# Altium PCB pay-ssm.PcbDoc (part 2 of 2)
Units mm, origin at the board's own origin, x right, y up, seen from the top; angles counter-clockwise.
Board outline 128 x 54 mm, 4 copper layers (Top Layer, GND, VCC, Bottom Layer), stack 0.778 mm thick; 182 components, 174 nets, 793 pads, 185 vias.
Unrouted connection lines stored in the file: 368.
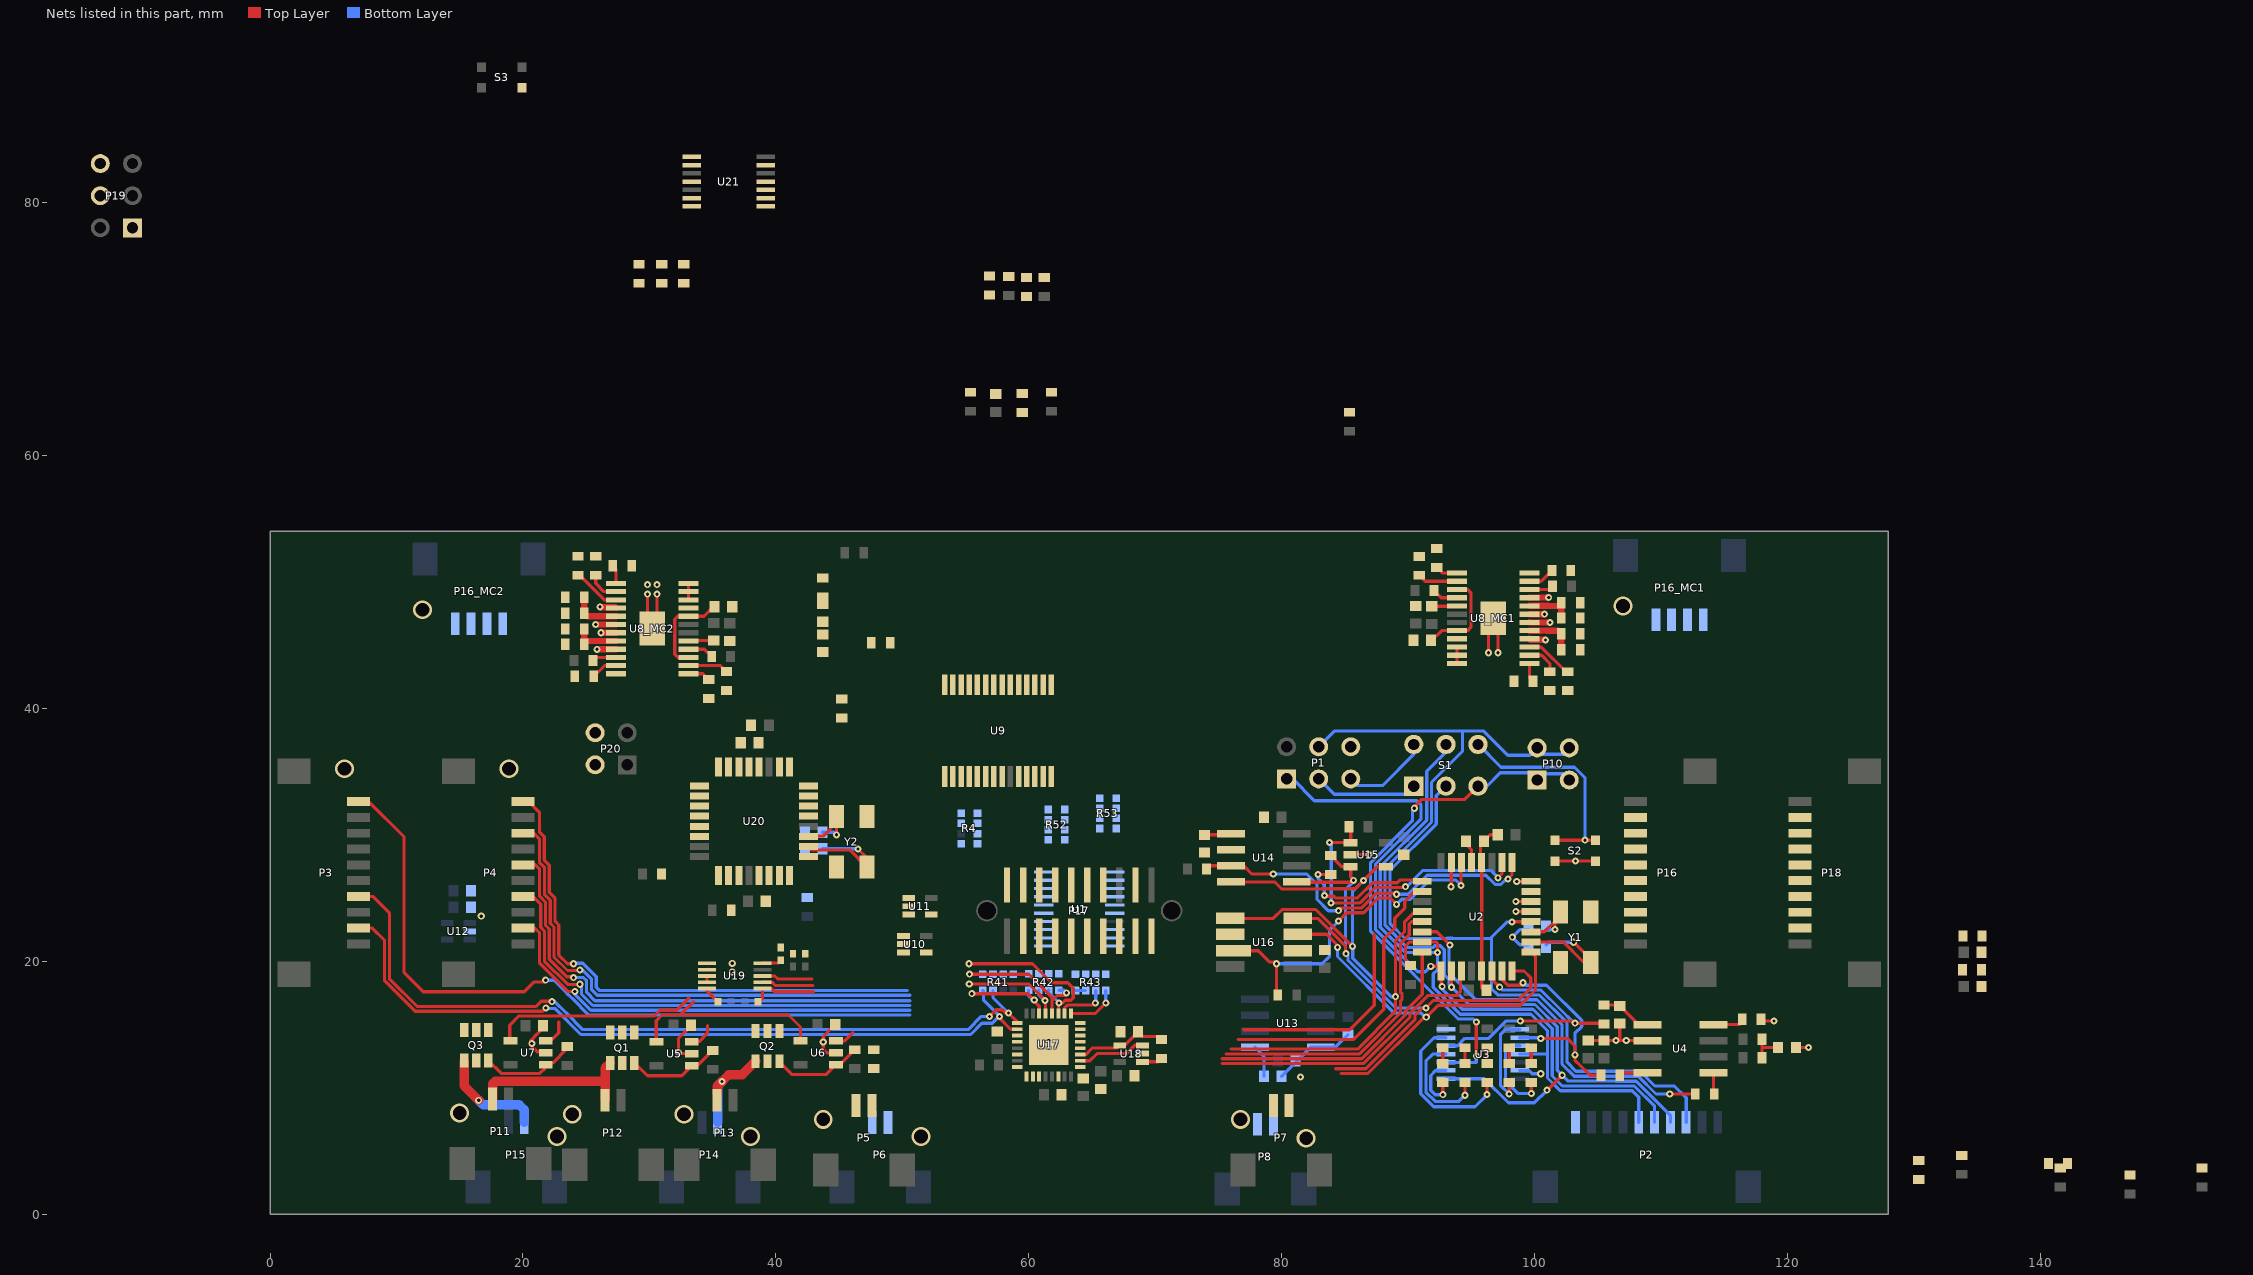
[diagram p4: the nets of this part, all layers, seen from the top]

## Via types
v1: diameter 0.559, hole 0.254, Top Layer to Bottom Layer, 145 vias
v2: diameter 1.5, hole 1.1, Top Layer to Bottom Layer, 32 vias
v3: diameter 6, hole 3.6, Top Layer to Bottom Layer, 8 vias

## Nets (pads, with @x,y where several pads share a name; then routed paths per layer and width w, separated by ;. In a path a pad name is that pad's centre, name@x,y a point inside that pad or via, vN(x,y) a via of type N, cw(c..) or ccw(c..) an arc to the next point about the centre after c; other vN are vias at no path point) (continued)
CH4: P3.10 R42.8 U17.14 | length 65.2
  Top Layer w0.254: P3.10@7,32.625 7.8,32.625 10.6,29.825 10.6,19.1 12.115,17.585 20.1,17.585 20.865,18.35 21.65,18.35 v1(21.8,18.5) ; v1(55.5,17.437) 59.937,17.437 v1(60.437,16.937) 60.323,16.937 60.827,16.433 U17.14@60.827,15.865
  Bottom Layer w0.254: v1(21.8,18.5) 22.454,18.5 23.467,17.488 23.467,17.479 23.879,17.067 23.888,17.067 25.216,15.738 50.6,15.738 ; R42.8@59.989,17.7 59.989,17.271 60.323,16.937 v1(60.437,16.937)
CH6: P4.6 R42.5 U17.12 | length 50.1
  Top Layer w0.254: P4.6@20,27.625 20.975,27.625 21.313,27.287 21.313,25.126 21.781,24.658 21.781,22.847 22.075,22.553 22.075,20.174 23.472,18.776 23.923,18.776 v1(24,18.7) ; v1(55.31,18.975) 60.025,18.975 61.833,17.167 61.833,16.888 ; U17.12@61.843,15.865 61.843,16.275 61.833,16.285 61.833,16.888 ; v1(62.989,17.5) 62.989,17.356 62.927,17.293 62.239,17.293 61.833,16.888
  Bottom Layer w0.254: v1(24,18.7) 24.017,18.717 24.783,18.717 25.033,18.467 25.033,17.537 25.69,16.881 50.6,16.881 ; R42.5@62.389,17.7 62.789,17.7 v1(62.989,17.5)
CH7: P4.4 R42.6 U17.11 | length 50.4
  Top Layer w0.254: P4.4@20,25.125 20.775,25.125 21.4,24.5 21.4,22.689 21.694,22.395 21.694,20.016 23.543,18.167 24.483,18.167 v1(24.5,18.183) ; v1(55.288,19.8) 60.3,19.8 61.8,18.3 63.104,18.3 63.531,17.873 63.531,17.1 63.343,16.912 62.899,16.912 62.687,16.7 v1(62.4,16.7) 62.351,16.651 U17.11@62.351,15.865
  Bottom Layer w0.254: v1(24.5,18.183) 24.633,18.05 24.633,17.399 25.532,16.5 50.6,16.5 ; R42.6@61.589,17.7 61.495,17.605 v1(62.4,16.7)
  other v2: 18.9,35.225
CH8: P4.8 R43.6 U17.10 | length 45.3
  Top Layer w0.254: P4.8@20,30.125 20.875,30.125 21.3,29.7 21.3,27.839 21.694,27.445 21.694,25.284 22.162,24.816 22.162,23.004 22.456,22.71 22.456,20.331 23.521,19.267 24.467,19.267 v1(24.5,19.3) ; U17.10@62.834,15.865 62.834,16.308 63.057,16.531 65.1,16.531 v1(65.269,16.7)
  Bottom Layer w0.254: v1(24.5,19.3) 24.739,19.3 25.414,18.624 25.414,17.77 25.87,17.315 50.6,17.315 ; v1(65.269,16.7) 65.3,16.731 R43.6@65.3,17.685
CH9: P4.10 R43.5 U17.9 | length 46.9
  Top Layer w0.254: P4.10@20,32.625 20.475,32.625 21.3,31.8 21.3,30.239 21.681,29.858 21.681,27.997 22.075,27.603 22.075,25.441 22.543,24.973 22.543,23.162 22.837,22.868 22.837,20.489 23.526,19.8 v1(24,19.8) ; U17.9@63.342,15.865 65.265,15.865 v1(66.1,16.7)
  Bottom Layer w0.254: v1(24,19.8) 24.033,19.833 24.744,19.833 25.795,18.782 25.795,17.928 26.027,17.696 50.4,17.696 ; v1(66.1,16.7) R43.5@66.1,17.685
CH10: U11.1 U11.4 U17.8
CH11: U10.1 U10.4 U17.7
CLKIN: P17.17 U1.5
DAC_C\L\R\: R47.1 U2.32 U19.5 | length 22.8
  Top Layer w0.254: U19.5@34.551,17.835 34.551,17.665 R47.1@35.414,16.803 ; 75.3,12.291 86.326,12.291 89.781,15.746 89.781,16.03 91.125,17.374 U2.32@91.125,20.728
DAC_C\S\: R46.1 U2.29 U19.6 | length 29.1
  Top Layer w0.254: R46.1@38.601,16.803 38.703,16.803 38.951,17.051 U19.6@38.951,17.835 39.663,17.835 39.913,17.585 42.99,17.585 ; 75.6,12.672 86.168,12.672 89.4,15.904 89.4,16.846 89.533,16.979 89.533,17.421 89.4,17.554 89.4,21.4 90.1,22.1 90.1,22.948 90.28,23.128 U2.29@91.125,23.128
DATA_RDY: R51.2 U2.16 U20.29 | length 1.3
  Top Layer w0.254: v1(98.6,26.3) 99.698,26.3 U2.16@99.725,26.328
  Bottom Layer w0.254: v1@98.433,26.3 v1(98.6,26.3)
DECAY: R30_MC1.2 R30_MC2.2 U8_MC1.3 U8_MC2.3 U9.23 | length 7.6
  Top Layer w0.254: R30_MC2.2@24.35,50.532 24.478,50.532 26.428,48.582 U8_MC2.3@27.36,48.582 ; U8_MC1.3@99.615,44.85 100.547,44.85 102.497,42.9 R30_MC1.2@102.625,42.9
DIR_A: U8_MC1.12 U9.24
DIR_B: U8_MC2.12 U9.4
E\N\_A: R23_MC1.1 U8_MC1.10 U9.26 | length 1.9
  Top Layer w0.254: U8_MC1.10@99.615,49.4 101.175,49.4 R23_MC1.1@101.425,49.65
E\N\_B: R23_MC2.1 U8_MC2.10 U9.6 | length 1.9
  Top Layer w0.254: R23_MC2.1@25.55,43.782 25.8,44.032 U8_MC2.10@27.36,44.032
F\L\T\_A: R20_MC1.1 U8_MC1.16 U9.21 | length 2.1
  Top Layer w0.254: R20_MC1.1@92.049,49.325 92.624,48.75 U8_MC1.16@93.875,48.75
F\L\T\_B: R20_MC2.1 U8_MC2.16 U9.22 | length 2.1
  Top Layer w0.254: U8_MC2.16@33.1,44.682 34.351,44.682 R20_MC2.1@34.926,44.107
GND: C1.1 C2.1 C4.1 C5.1 C6.2 C7.1 C8.1 C9.1 C10.1 C11.1 C12.1 C13.2 C14.2 C15.2 C16_MC1.1 C16_MC2.1 C18_MC1.1 C18_MC2.1 C19.1 C20.1 C21.1 C22.1 C23.1 C24.1 C25.1 C26.1 C27.1 C28.1 C29.1 C30.1 C31.1 C32.1 C33.1 C34.1 C35.1 C36.1 C37.1 C38.1 C39.2 C44.1 C45.1 C62.1 C63.1 C64.2 P1.6 P2.1 P6.2 P8.2 P16.2 P16.9 P17.1 P17.20 P18.2 P18.9 P19.6 Q1.4 Q2.4 Q3.4 R3.1 R16.1 R21_MC1.1 R21_MC2.1 R22_MC1.1 R22_MC2.1 R24_MC1.1 R24_MC2.1 R25_MC1.1 R25_MC2.1 R26_MC1.1 R26_MC2.1 R27_MC1.1 R27_MC2.1 R28_MC1.1 R28_MC2.1 R29_MC1.1 R29_MC2.1 R30_MC1.1 R30_MC2.1 R31_MC1.1 R31_MC2.1 R35.1 R37.1 R39.1 R40.1 R41.1 R41.2 R41.3 R41.4 R42.1 R42.2 R42.3 R42.4 R43.1 R43.2 R43.3 R43.4 R44.2 R51.1 S2.2 S3.3 U1.10 U2.5 U2.20 U3.7 U3.13 U4.2 U5.2 U6.2 U7.2 U8_MC1.21 U8_MC1.25 U8_MC2.21 U8_MC2.25 U9.3 U9.7 U9.8 U9.10 U10.2 U11.2 U12.2 U13.4 U14.2 U15.2 U16.2 U16.6 U17.1 U17.4 U17.5 U17.6 U17.19 U17.20 U17.22 U17.27 U17.30 U17.33 U18.2 U19.3 U19.4 U20.5 U20.20 U21.7 U21.13 Y1.2 Y1.4 Y2.2 Y2.4 | length 59.7
  Top Layer w0.254: C14.2@21.7,15.174 21.7,14.8 21.154,14.254 21.145,14.254 20.609,13.718 20.609,13.5 v1(20.7,13.5) 20.7,13.471 20.6,13.371 21.135,12.836 U7.2@21.75,12.836 ; v1(29.85,49.032) 29.85,46.782 30.6,47.532 v1(30.6,49.032) ; C13.2@33.3,14.948 33.3,14.898 32.3,13.898 v1(32.3,12.798) 32.4,12.698 U5.2@33.35,12.698 ; U19.4@34.551,18.335 U19.3@34.551,18.835 ; C15.2@44.7,15 43.75,14.05 v1(43.75,13.604) 43.75,13.05 44.05,12.75 U6.2@44.75,12.75 ; v1(61.589,13.159) U17.33@61.589,13.376 v1(61.589,13.738) ; U16.6@81.275,20.837 U16.6@81.325,20.887 ; U15.2@85.467,28.432 86.9,28.432 v1(86.907,28.425) ; C6.2@95.9,29.675 95.725,29.5 95.725,27.928 U2.20@95.825,27.828 U2.5@95.825,19.228 95.825,17.875 C4.1@96.2,17.5 ; C6.2@96,29.5 96.5,30 C5.1@97.1,30 ; v1(96.375,44.4) 96.375,45.9 97.125,46.65 v1(97.125,44.4) ; S2.2@101.625,27.925 v1(103.25,27.925) S2.2@104.825,27.925 ; C9.1@104.25,13.731 C10.1@105.5,13.731 v1(106.45,13.731) 106.46,13.721 106.75,13.721 ; C12.1@106.75,15.074 106.75,13.721 ; U4.2@108.89,13.781 U4.2@108.95,13.721 v1(107.26,13.721) 106.75,13.721 ; R16.1@118,15.281 v1(118.95,15.281) ; C11.1@120.672,13.177 v1(121.678,13.177)
  Bottom Layer w0.254: v1(16.7,23.562) v1@16.8,23.562 ; C25.1@80,10.9 82.295,13.195 U13.4@83.1,13.195 84.247,13.195 C24.1@85.252,14.2 ; U3.13@98.842,11.365 99.568,11.365 99.833,11.1 v1(100.5,11.1) ; C8.1@99.525,21.303 98.85,21.303 v1(98.25,21.903) 98.85,22.503 C7.1@99.525,22.503
  other v1: 81.5,10.85 36.551,19.162 36.551,19.835 29.85,49.782 30.6,49.782
  other v2: 81.95,6 51.48,6.15
HM_C\S\: R45.1 U2.17 U14.3 | length 29.3
  Top Layer w0.254: R45.1@74.05,27.3 74.296,27.546 U14.3@76,27.546 77.004,27.546 77.65,26.9 v1(79.341,26.9) ; v1(84.5,24) 84.719,24.219 86.328,24.219 87.49,25.381 89.019,25.381 v1(89.1,25.3) ; v1(97.9,26.5) 98.225,26.825 U2.17@98.225,27.828
  Bottom Layer w0.254: v1(79.341,26.9) 82,26.9 82.8,26.1 82.8,24.9 83.7,24 v1(84.5,24) ; v1(89.1,25.3) 90,25.3 91.507,26.807 96.163,26.807 96.904,26.067 97.346,26.067 97.779,26.5 v1(97.9,26.5)
INTA: U2.26 U9.20 | length 23.5
  Top Layer w0.254: 76.563,13.815 85.695,13.815 88.086,16.206 88.086,21.8 88.122,21.8 88.951,22.629 88.951,23.416 89.74,24.204 89.74,24.727 90.541,25.528 U2.26@91.125,25.528
INTB: U9.19
LBK: R14.2 U2.30 | length 30.3
  Top Layer w0.254: U2.30@91.125,22.328 92.272,22.328 v1(93.308,21.292) v1@93.308,21.328 ; v1(110.7,9.5) R14.2@112.723,9.5
  Bottom Layer w0.254: v1@93.248,21.079 93.248,20.321 93.248,19.091 93.614,18.725 93.614,18.686 95.342,16.958 100.203,16.958 102.176,14.985 102.176,11.864 103.14,10.9 108.216,10.9 109.616,9.5 v1(110.7,9.5) ; v1@93.248,21.079 93.248,21.352 v1(93.308,21.292)
LED_CLK: P16.7 P18.7 P19.4 R4.7 R22.1 U20.2
LED_PEX_C\S\: P16.6 P18.6 U20.13
LED_PEX_R\S\T\: P16.8 P18.8 U20.15
M0: R21_MC1.2 R21_MC2.2 U8_MC1.13 U8_MC2.13 U9.27 | length 3.5
  Top Layer w0.254: U8_MC2.13@33.1,42.732 34.238,42.732 R21_MC2.2@34.688,42.282 ; R21_MC1.2@92.287,51.15 92.737,50.7 U8_MC1.13@93.875,50.7
M1: R22_MC1.2 R22_MC2.2 U8_MC1.14 U8_MC2.14 U9.28 | length 6.4
  Top Layer w0.254: U8_MC2.14@33.1,43.382 35.625,43.382 R22_MC2.2@36.1,42.907 ; R22_MC1.2@90.875,50.525 91.35,50.05 U8_MC1.14@93.875,50.05
MISO: R4.1 R55.2 U2.8 U9.14 U14.5 U15.3 U16.8 U17.26 | length 49.1
  Top Layer w0.254: U16.8@81.275,23.387 82.852,23.387 85.067,21.172 85.067,20.633 v1(85.1,20.6) ; U14.5@82.171,26.276 U14.5@81.2,26.276 81.2,26.246 85.546,26.246 v1(85.7,26.4) 85.467,26.633 U15.3@85.467,27.482 84.768,27.482 R55.2@83.9,28.35 ; 84.258,11.5 86.665,11.5 90.543,15.378 90.543,15.714 91.129,16.3 v1(91.413,16.3) 92.013,16.9 98.715,16.9 99.7,17.885 99.7,18.7 99.172,19.228 U2.8@98.225,19.228
  Bottom Layer w0.254: v1(85.7,26.4) 85.7,26.333 85.067,25.7 85.067,20.633 v1(85.1,20.6) 85.252,20.448 85.252,20.086 89.039,16.3 v1(91.413,16.3)
MISO_32M1: P16.3 P18.3 U1.3 U20.8 U21.9
MISO_A: P19.1 R4.8 U20.1
MISO_IN: P17.3 U1.17
MOSI: R4.2 U2.9 U9.13 U16.7 U17.25 U19.8 | length 38.7
  Top Layer w0.254: U19.8@38.901,18.835 U19.8@38.935,18.801 ; U19.8@38.951,18.835 39.935,18.835 40.185,18.585 42.851,18.585 ; U16.7@81.275,22.137 83.563,22.137 84.423,21.277 v1(84.423,21.1) ; 84.7,11.119 86.823,11.119 91.281,15.578 v1(91.445,15.578) 92.386,16.519 98.873,16.519 100.081,17.727 100.081,20.372 U2.9@99.725,20.728
  Bottom Layer w0.254: v1(84.423,21.1) 84.423,20.377 88.9,15.9 91.058,15.9 91.381,15.578 v1(91.445,15.578)
MOSI_32M1: P16.4 P18.4 U1.2 U20.9 U21.11
MOSI_A: P1.4 P2.7 P10.2 P10.4 U2.2 U3.1 | length 84.2
  Top Layer w0.254: U2.2@93.425,19.228 93.425,17.961 v1(93.443,17.943) ; v1(101,9.8) 102.184,10.984 v1(102.195,10.984)
  Bottom Layer w0.254: P1.4@82.935,36.96 84.175,38.2 94.3,38.2 ; U3.1@93,10.705 96.045,10.705 97.95,8.8 100,8.8 v1(101,9.8) ; P10.4@102.85,36.375 100.31,36.375 100.266,36.37 99.635,36.3 97.9,36.3 96,38.2 94.3,38.2 ; P2.7@110.75,7.262 110.75,7.828 108.066,10.512 106.4,10.512 106.393,10.519 102.66,10.519 v1(102.195,10.984) 101.795,11.383 101.795,11.637 101.795,14.827 100.046,16.577 94.81,16.577 v1(93.443,17.943) 93.233,18.153 93.233,18.567 92.867,18.933 92.867,20.479 92.867,20.921 92.554,21.233 92.112,21.233 91.96,21.081 89.942,21.081 88.186,22.837 88.186,27.333 91.857,31.004 91.857,34.143 94.3,36.586 94.3,38.2
MOSI_IN: P17.5 U1.18
MUX_5_EN: P17.9 U1.14
NetC6_1: C6.1 U2.21 | length 2
  Top Layer w0.254: C6.1@94.325,29.5 95.025,28.8 U2.21@95.025,27.828
NetC7_2: C7.2 U2.11 Y1.3 | length 4.2
  Top Layer w0.254: U2.11@99.725,22.328 100.775,22.328 101.625,23.178 Y1.3@101.625,23.928 ; v1(101.625,22.503) Y1.3@101.625,23.028
  Bottom Layer w0.254: C7.2@100.925,22.503 v1(101.625,22.503)
NetC8_2: C8.2 U2.10 Y1.1 | length 9.7
  Top Layer w0.254: U2.10@99.725,21.528 102.272,21.528 103.897,19.903 104.397,19.903 104.397,20.203 v1(103.1,21.5)
  Bottom Layer w0.254: C8.2@100.925,21.303 101.123,21.5 v1(103.1,21.5)
NetC11_2: C11.2 R12.2 R15.2 | length 2.8
  Top Layer w0.254: R12.2@118,12.377 118,13.11 ; R15.2@118,13.844 118,13.11 ; C11.2@119.272,13.177 118.067,13.177 118,13.11
NetC12_2: C12.2 R13.1 U4.1 | length 4.1
  Top Layer w0.254: R13.1@105.5,16.531 106.693,16.531 C12.2@106.75,16.474 108.233,14.991 U4.1@108.95,14.991
NetC17_MC1_1: C17_MC1.1 U8_MC1.17 | length 2
  Top Layer w0.254: C17_MC1.1@91.875,48.075 93.85,48.075 U8_MC1.17@93.875,48.1
NetC17_MC2_1: C17_MC2.1 U8_MC2.17 | length 2
  Top Layer w0.254: U8_MC2.17@33.1,45.332 33.125,45.357 C17_MC2.1@35.1,45.357
NetC25_2: C25.2 U13.5 | length 2.6
  Bottom Layer w0.254: U13.5@77.9,13.195 78.6,12.495 C25.2@78.6,10.9
NetC28_2: C28.2 U14.1 | length 2.1
  Top Layer w0.254: C28.2@73.9,30 75.914,30 U14.1@76,30.086
NetC36_2: C36.2 R50.2 U17.3 U18.4 | length 7.4
  Top Layer w0.254: U17.3@64.078,12.614 64.505,12.614 65.031,13.14 66.991,13.14 U18.4@67.2,13.349 67.588,13.349 C36.2@68.65,14.411 69.008,14.052 70.246,14.052 R50.2@70.5,13.798
NetC39_1: C39.1 U20.21
NetC44_2: C44.2 U20.10 Y2.1 | length 9.8
  Top Layer w0.254: U20.10@42.575,29.075 42.846,28.804 45.846,28.804 Y2.1@47.2,27.45 47.2,28.175 v1(46.5,28.875)
  Bottom Layer w0.254: C44.2@43.7,28.9 46.475,28.9 v1(46.5,28.875)
NetC45_2: C45.2 U20.11 Y2.3 | length 5.3
  Top Layer w0.254: U20.11@42.575,29.875 42.6,29.9 43.75,29.9 Y2.3@44.8,30.95 ; v1(44.8,30) Y2.3@44.8,30.95 ; Y2.3@44.8,31.45 Y2.3@44.8,30.95
  Bottom Layer w0.254: C45.2@43.7,30.2 44.6,30.2 v1(44.8,30)
NetC64_1: C64.1 U19.10 | length 1.6
  Top Layer w0.254: U19.10@38.951,19.835 38.985,19.868 40.185,19.868 C64.1@40.401,20.085
NetD1_1: D1.1 R6.2 | length 1.3
  Top Layer w0.254: D1.1@92.753,11.905 R6.2@92.753,13.155
NetD1_2: D1.2 U3.2 | length 4.6
  Top Layer w0.254: v1(92.753,9.447) D1.2@92.753,10.405
  Bottom Layer w0.254: v1(92.753,9.447) 92.153,9.447 91.8,9.8 91.8,10.965 92.2,11.365 U3.2@93,11.365
NetD2_1: D2.1 R7.2 | length 1.3
  Top Layer w0.254: D2.1@94.503,11.905 R7.2@94.503,13.155
NetD2_2: D2.2 U3.4 | length 8.9
  Top Layer w0.254: v1(94.503,9.403) D2.2@94.503,10.405
  Bottom Layer w0.254: U3.4@93,12.66 91.96,12.66 91.422,12.122 91.422,11.126 91.419,11.123 91.419,9.642 92.147,8.914 94.014,8.914 v1(94.503,9.403)
NetD3_1: D3.1 R8.2 | length 1.3
  Top Layer w0.254: D3.1@96.253,11.905 R8.2@96.253,13.155
NetD3_2: D3.2 U3.6 | length 12.8
  Top Layer w0.254: v1(96.253,9.453) D3.2@96.253,10.405
  Bottom Layer w0.254: U3.6@93,13.956 92.056,13.956 91,12.9 91,9.522 92.022,8.5 95.3,8.5 v1(96.253,9.453)
NetD4_1: D4.1 R9.2 | length 1.3
  Top Layer w0.254: D4.1@98.003,11.905 R9.2@98.003,13.155
NetD4_2: D4.2 U3.8 | length 7.6
  Top Layer w0.254: v1(98.003,9.503) D4.2@98.003,10.405
  Bottom Layer w0.254: v1(98.003,9.503) 97.306,10.2 97.306,14.194 97.727,14.616 U3.8@98.842,14.616
NetD5_1: D5.1 R10.2 | length 1.3
  Top Layer w0.254: D5.1@99.753,11.905 R10.2@99.753,13.155
NetD5_2: D5.2 U3.10 | length 7.2
  Top Layer w0.254: v1(99.753,9.53) D5.2@99.753,10.405
  Bottom Layer w0.254: U3.10@98.842,13.321 98,13.321 97.7,13.021 97.7,10.56 98.536,9.724 98.73,9.53 v1(99.753,9.53) v1@99.833,9.61
NetD6_1: D6.1 R57.2
NetD6_2: D6.2 U21.2
NetD7_1: D7.1 R59.2
NetD7_2: D7.2 U21.4
NetD8_1: D8.1 R61.2
NetD8_2: D8.2 U21.6
NetD9_1: D9.1 R62.2
NetD9_2: D9.2 U21.8
NetD10_1: D10.1 R63.2
NetD10_2: D10.2 U21.10
NetP1_3: P1.3 S1.1 | length 8.3
  Bottom Layer w0.254: P1.3@82.935,34.42 84.155,33.2 89.811,33.2 S1.1@90.46,33.849
NetP1_5: P1.5 S1.4 | length 7
  Bottom Layer w0.254: P1.5@85.475,34.42 85.995,33.9 88,33.9 90.46,36.36 S1.4@90.46,37.151
NetP6_1: P6.1 R1.2
NetP8_1: P8.1 R2.2
NetP11_2: P11.2 P12.2 Q1.1 Q1.2 Q1.5 Q1.6 | length 13.1
  Top Layer w0.75: P11.2@17.6,9.1 17.6,10.298 17.804,10.502 19.408,10.502 19.41,10.5 26.5,10.5 26.5,11.548 Q1.1@26.9,11.948 ; P12.2@26.5,9 26.5,10.3
  other v2: 23.9,7.9 15,8
NetP13_2: P13.2 P14.2 Q2.1 Q2.2 Q2.5 Q2.6 | length 7.9
  Top Layer w0.75: P13.2@35.35,9.5 35.35,10.1 36.272,11.022 37.332,11.022 Q2.1@38.4,12.09
  Bottom Layer w0.75: P14.2@35.4,7.25 35.4,10.15 v1(35.75,10.5)
  other v2: 38,6.15 32.75,7.9
NetP15_2: P15.2 Q3.1 Q3.2 Q3.5 Q3.6 | length 8.5
  Top Layer w0.75: Q3.1@15.35,12.149 15.35,10.15 v1(16.5,9)
  Bottom Layer w0.75: v1(16.5,9) 16.848,8.652 19.698,8.652 20.1,8.25 P15.2@20.1,7.25
  other v2: 22.7,6.15
NetP16_MC1_1: P16_MC1.1 U8_MC1.4 | length 1.3
  Top Layer w0.5: U8_MC1.4@99.615,45.5 99.683,45.432 100.843,45.432 v1(100.875,45.4)
NetP16_MC1_2: P16_MC1.2 U8_MC1.6 | length 1.6
  Top Layer w0.5: U8_MC1.6@99.615,46.8 99.621,46.794 101.219,46.794 v1(101.225,46.8)
NetP16_MC1_3: P16_MC1.3 U8_MC1.9 | length 1.5
  Top Layer w0.5: U8_MC1.9@99.615,48.75 99.628,48.763 v1(101.125,48.763)
  other v2: 107,48.1
NetP16_MC1_4: P16_MC1.4 U8_MC1.7 | length 1.2
  Top Layer w0.5: U8_MC1.7@99.615,47.45 v1(100.8,47.45)
NetP16_MC2_1: P16_MC2.1 U8_MC2.4 | length 1.3
  Top Layer w0.5: v1(26.1,48.032) 26.132,48 27.292,48 U8_MC2.4@27.36,47.932
NetP16_MC2_2: P16_MC2.2 U8_MC2.6 | length 1.6
  Top Layer w0.5: v1(25.75,46.632) 25.756,46.639 27.354,46.639 U8_MC2.6@27.36,46.632
NetP16_MC2_3: P16_MC2.3 U8_MC2.9 | length 1.5
  Top Layer w0.5: v1(25.85,44.669) 27.347,44.669 U8_MC2.9@27.36,44.682
  other v2: 12.05,47.8
NetP16_MC2_4: P16_MC2.4 U8_MC2.7 | length 1.2
  Top Layer w0.5: v1(26.175,45.982) U8_MC2.7@27.36,45.982
NetQ1_3: Q1.3 R17.1 U5.1 | length 7.4
  Top Layer w0.254: Q1.3@28.8,11.948 28.85,11.948 29.85,10.948 32.55,10.948 U5.1@33.35,11.748 33.794,11.748 R17.1@35,12.955
NetQ2_3: Q2.3 R18.1 U6.1 | length 7.2
  Top Layer w0.254: Q2.3@40.3,12.09 40.3,12.003 41.25,11.053 44.003,11.053 U6.1@44.75,11.8 45.046,11.8 R18.1@46.25,13.004
NetQ3_3: Q3.3 R19.1 U7.1 | length 7.8
  Top Layer w0.254: Q3.3@17.25,12.149 17.252,12.149 18.269,11.131 19.668,11.131 19.67,11.129 21.329,11.129 21.75,11.55 21.75,11.886 21.809,11.944 22.342,11.944 23.5,13.103 R19.1@23.5,13.25
NetR3_2: R3.2 U1.1 U1.19
NetR11_1: R11.1 U4.4 | length 2.3
  Top Layer w0.254: R11.1@106.75,10.977 106.954,11.181 U4.4@108.95,11.181
NetR14_1: R14.1 U4.5 | length 1.7
  Top Layer w0.254: U4.5@114.15,11.181 114.15,9.573 R14.1@114.223,9.5
NetR16_2: R16.2 U4.8 | length 2.5
  Top Layer w0.254: U4.8@114.15,14.991 116.21,14.991 R16.2@116.5,15.281
NetR24_MC1_2: R24_MC1.2 R27_MC1.2 U8_MC1.5 | length 3.9
  Top Layer w0.5: U8_MC1.5@99.615,46.15 99.621,46.144 100.49,46.144 100.503,46.156 100.94,46.156 100.953,46.144 101.497,46.144 101.503,46.15 101.875,46.15 R24_MC1.2@102.125,45.9 R27_MC1.2@102.125,44.65
NetR24_MC2_2: R24_MC2.2 R27_MC2.2 U8_MC2.5 | length 3.9
  Top Layer w0.5: R27_MC2.2@24.85,48.782 R24_MC2.2@24.85,47.532 25.1,47.282 25.472,47.282 25.478,47.289 26.022,47.289 26.035,47.276 26.472,47.276 26.485,47.289 27.354,47.289 U8_MC2.5@27.36,47.282
NetR25_MC1_2: R25_MC1.2 R26_MC1.2 U8_MC1.8 | length 3.5
  Top Layer w0.5: U8_MC1.8@99.615,48.1 99.621,48.106 101.072,48.106 101.078,48.1 102.125,48.1 R26_MC1.2@102.125,47.15
NetR25_MC2_2: R25_MC2.2 R26_MC2.2 U8_MC2.8 | length 3.5
  Top Layer w0.5: R26_MC2.2@24.85,46.282 24.85,45.332 25.897,45.332 25.903,45.326 27.354,45.326 U8_MC2.8@27.36,45.332
NetR31_MC1_2: R31_MC1.2 U8_MC1.2 | length 2.5
  Top Layer w0.254: U8_MC1.2@99.615,44.2 100.575,44.2 101.225,43.55 R31_MC1.2@101.225,42.9
NetR31_MC2_2: R31_MC2.2 U8_MC2.2 | length 2.5
  Top Layer w0.254: R31_MC2.2@25.75,50.532 25.75,49.882 26.4,49.232 U8_MC2.2@27.36,49.232
NetR34_2: R34.2 R35.2 U9.17
NetR36_2: R36.2 R37.2 U9.16
NetR38_2: R38.2 R39.2 U9.15
NetR43_7: R43.7 R43.8 | length 0.8
  Bottom Layer w0.254: R43.8@63.7,17.685 R43.7@64.5,17.685
NetR50_1: R50.1 U18.1 | length 1.6
  Top Layer w0.254: U18.1@69,12.048 70.25,12.048 R50.1@70.5,12.298
NetS1_6: S1.6 S2.1 | length 17.7
  Top Layer w0.254: S2.1@101.625,29.575 v1(104,29.575) S2.1@104.825,29.575
  Bottom Layer w0.254: S1.6@95.54,37.151 97.352,35.339 103.166,35.339 104,34.505 v1(104,29.575)
NetU8_MC1_22: U8_MC1.22 U8_MC1.23 U8_MC1.24 | length 1.3
  Top Layer w0.254: U8_MC1.24@93.875,43.55 U8_MC1.23@93.875,44.2 U8_MC1.22@93.875,44.85
NetU8_MC2_22: U8_MC2.22 U8_MC2.23 U8_MC2.24 | length 1.3
  Top Layer w0.254: U8_MC2.22@33.1,48.582 U8_MC2.23@33.1,49.232 U8_MC2.24@33.1,49.882
NetU17_2: U17.2 U18.3 | length 5.4
  Top Layer w0.254: U17.2@64.078,12.132 64.835,12.132 65.4,12.697 67.721,12.697 68.372,13.349 U18.3@69,13.349
PB2/INT1: R52.2 U20.16
PB3/PCINT3: U20.23
PB4: U1.8 U20.24
PB5/INT2: R52.3 U20.26
PB6: U1.11 U20.27
PC0/INT3: R52.4 U20.30
PC2: U1.6 U20.6
PC3: R53.1 U20.7
PC4: R53.2 U20.17
PC5: R53.3 U20.18
PC6: R53.4 U20.22
PC7: U1.13 U20.25
PD6/INT0: R52.1 U20.14
PD7: U2.15
PEX_C\S\: R33.1 U2.13 U9.11 | length 1.8
  Top Layer w0.254: v1(98.528,23.928) U2.13@99.725,23.928 U2.13@100.309,23.928
PEX_R\S\T\: R32.1 U2.14 U9.18 | length 1.2
  Top Layer w0.254: v1(98.528,24.728) U2.14@99.725,24.728
POS_LED_1: R1.1 U9.2
POS_LED_2: R2.1 U9.1
POS_PHT_1: P5.2 R44.1 U11.3
  other v2: 43.75,7.5
POS_PHT_2: P7.2 R40.2 U10.3
  other v2: 76.75,7.5
PR_C\S\: R48.2 U2.22 U16.3 | length 27.4
  Top Layer w0.254: U16.3@76.2,20.837 78.163,20.837 79.065,19.935 79.6,19.935 v1(79.6,19.8) 79.6,17.434 R48.2@79.7,17.334 ; v1(84.5,23.178) 85.16,23.838 86.485,23.838 87.647,25 88.6,25 v1(89.1,24.5) ; v1(94.2,26) 94.2,27.802 U2.22@94.225,27.828
  Bottom Layer w0.254: v1(79.6,19.8) 83.2,19.8 83.8,20.4 83.8,22.478 v1(84.5,23.178) ; v1(89.1,24.5) 89.5,24.9 90.2,24.9 91.726,26.426 93.774,26.426 v1(94.2,26)
R\S\T\: P2.5 R5.1 S1.5 U2.31 U3.11 | length 56.3
  Top Layer w0.254: R5.1@90.2,19.65 89.8,20.05 89.8,21.2 90.128,21.528 U2.31@91.125,21.528 92.228,21.528 92.333,21.422 v1(92.333,20.7)
  Bottom Layer w0.254: S1.5@93,37.151 93,36.538 91.476,35.014 91.476,31.162 87.805,27.491 87.805,22.68 89.784,20.7 v1(92.333,20.7) 92.333,19.336 92,19.003 92,17.945 94.131,15.815 99.73,15.815 101.033,14.512 101.033,12.7 ; U3.11@98.842,12.66 100.994,12.66 101.033,12.7 ; P2.5@108.25,7.262 108.25,9.25 107.75,9.75 102.05,9.75 101.033,10.767 101.033,10.879 101.033,11.321 101.033,12.7
RXCAN: R11.2 U2.7 U3.9 | length 19.6
  Top Layer w0.254: U2.7@97.425,19.228 97.425,18.575 97.9,18.1 v1@99.1,18.1 ; v1(100.5,13.9) 102.6,13.9 103.2,13.3 v1(103.2,12.6) 103.2,12.172 103.695,11.677 103.703,11.677 104.403,10.977 R11.2@105.25,10.977
  Bottom Layer w0.254: U3.9@98.842,13.956 100.444,13.956 v1(100.5,13.9) ; v1(99.1,18.3) 99.299,18.101 100.953,18.101 103.733,15.321 103.733,14.833 103.2,14.3 v1(103.2,12.6)
RXLIN: P10.1 P10.3 S1.3 U3.3 | length 41.6
  Top Layer w0.254: v1@90.45,32.15 91.1,32.8 94.491,32.8 S1.3@95.54,33.849 ; v1(95.4,12.5) v1(95.4,15.2)
  Bottom Layer w0.254: v1(90.5,32.1) 90.348,31.948 90.348,31.111 87.043,27.806 87.043,22.364 93.973,15.434 95.166,15.434 v1(95.4,15.2) ; U3.3@93,12 95.4,12 v1(95.4,12.5) ; S1.3@95.54,33.849 96.249,33.849 97.3,34.9 99.645,34.9 100.259,34.84 100.31,34.835 P10.3@102.85,34.835
S\L\P\_A: R28_MC1.2 U8_MC1.1 U9.25 | length 1.5
  Top Layer w0.254: U8_MC1.1@99.615,43.55 99.615,42.41 R28_MC1.2@99.875,42.15
S\L\P\_B: R28_MC2.2 U8_MC2.1 U9.5 | length 1.5
  Top Layer w0.254: R28_MC2.2@27.1,51.282 27.36,51.022 U8_MC2.1@27.36,49.882
SCK: R4.3 U2.28 U9.12 U14.4 U15.4 U16.1 U17.24 U19.7 | length 63
  Top Layer w0.254: U19.7@38.951,18.335 39.701,18.335 39.951,18.085 42.951,18.085 ; U16.1@75.925,23.387 79.341,23.387 80.045,24.091 82.687,24.091 v1(85.6,21.178) ; 76,13.053 86.01,13.053 89,16.043 v1(89,17.2) 89,21.6 89.713,22.313 89.713,23.1 90.541,23.928 U2.28@91.125,23.928 ; U14.4@76,26.276 79.441,26.276 79.995,25.722 83.168,25.722 83.179,25.733 85.834,25.733 v1(86.475,26.375) 87.582,27.482 U15.4@88.267,27.482
  Bottom Layer w0.254: v1(86.475,26.375) 85.6,25.5 v1(85.6,21.178) 85.633,21.144 85.633,20.244 88.678,17.2 v1(89,17.2)
SCK_32M1: P16.5 P18.5 U1.4 U20.28
SCK_A: P2.8 S1.2 U2.12 | length 51.7
  Top Layer w0.254: v1(98.223,23.1) 98.25,23.128 U2.12@99.725,23.128
  Bottom Layer w0.254: S1.2@93,33.849 92.238,33.087 92.238,30.846 88.567,27.175 88.567,22.995 89.762,21.8 93.062,21.8 93.087,21.825 93.529,21.825 93.554,21.8 96.6,21.8 ; v1(98.223,23.1) 97.8,23.1 96.6,21.9 96.6,21.8 ; P2.8@112,7.262 112,9.2 111.069,10.131 109.524,10.131 108.355,11.3 103.279,11.3 102.581,11.999 102.581,15.119 100.361,17.339 97.1,17.339 96.6,17.839 96.6,21.8
SCK_IN: P17.7 U1.16
SD1_C\S\: P17.10 R53.8
SD2_C\S\: P17.8 R53.7
SD3_C\S\: P17.6 R53.6
SD4_C\S\: P17.4 R53.5
SENS_ADC_C\S\: P17.13 U1.9
SENS_C\S\: R4.4 U2.23 | length 18.7
  Top Layer w0.254: 77.001,14.577 85.379,14.577 87.324,16.521 87.324,22.1 ; v1(93.4,25.893) 93.425,25.918 U2.23@93.425,27.828
SENS_CLK: R4.5 R20.1 U1.15 U20.3
SENS_DAC_C\S\: P17.11 U1.12
SENS_MISO_A: P1.1 P2.6 U2.1 | length 55.4
  Top Layer w0.254: v1(91.8,19.6) 92.253,19.6 U2.1@92.625,19.228 92.625,17.975 92.65,18 v1(92.7,18)
  Bottom Layer w0.254: P1.1@80.395,34.42 80.88,34.42 82.6,32.7 90.7,32.7 91.033,32.367 91.033,31.258 87.424,27.648 87.424,22.522 90.784,19.162 91.362,19.162 v1(91.8,19.6) ; v1(92.7,18) 92.7,17.784 94.289,16.196 99.888,16.196 101.414,14.669 101.414,11.479 ; 101.414,11.479 101.414,10.924 102.208,10.131 107.908,10.131 109.5,8.539 P2.6@109.5,7.262
STEP: R29_MC1.2 R29_MC2.2 U2.3 U8_MC1.11 U8_MC2.11 | length 27.3
  Top Layer w0.254: R29_MC2.2@25.6,42.532 26.45,43.382 U8_MC2.11@27.36,43.382 ; 75.3,11.901 86.475,11.901 90.162,15.588 90.162,15.872 91.506,17.216 91.506,17.246 91.541,17.281 93.854,17.281 94.146,17.573 94.146,19.148 U2.3@94.225,19.228 ; U8_MC1.11@99.615,50.05 100.525,50.05 R29_MC1.2@101.375,50.9
SYNCO1: P17.18 R52.8
SYNCO2: P17.16 R52.7
SYNCO3: P17.14 R52.6
SYNCO4: P17.12 R52.5
THM_1: P3.2 R41.8 U5.3 U17.18 | length 63.5
  Top Layer w0.254: P3.2@7,22.625 8.075,22.625 9.057,21.643 9.057,18.461 11.476,16.042 19.503,16.042 19.509,16.048 21.556,16.048 v1(21.809,16.3) ; U5.3@33.35,13.648 33.938,13.648 34.588,14.299 34.588,14.898 ; v1(57.7,15.635) 57.7,15.483 58.563,14.621 U17.18@59.1,14.621
  Bottom Layer w0.254: v1(21.809,16.3) 21.842,16.267 22.524,16.267 24.583,14.208 55.408,14.208 56.302,15.102 57.121,15.102 57.654,15.635 v1(57.7,15.635) 56.433,16.902 56.433,17.625 R41.8@56.374,17.685
THM_2: P4.2 R42.7 U6.3 U17.13 | length 45.1
  Top Layer w0.254: P4.2@20,22.625 20.925,22.625 21.313,22.237 21.313,19.858 23.571,17.6 v1(24.1,17.6) ; U6.3@44.75,13.7 45.452,13.7 46.1,14.348 ; v1(55.3,18.2) 60,18.2 v1(61.3,16.9) 61.335,16.865 U17.13@61.335,15.865
  Bottom Layer w0.254: v1(24.1,17.6) 24.1,17.393 25.374,16.119 50.6,16.119 ; R42.7@60.789,17.7 60.789,17.339 60.971,17.158 60.971,17.129 61.2,16.9 v1(61.3,16.9)
THM_3: P3.4 R41.7 U7.3 U17.17 | length 65.4
  Top Layer w0.254: P3.4@7,25.125 8.137,25.125 9.438,23.824 9.438,18.619 11.634,16.423 19.345,16.423 19.351,16.429 21.042,16.429 21.446,16.833 22.267,16.833 v1(22.3,16.8) ; U7.3@21.8,13.7 22.189,13.7 22.837,14.348 22.837,15.2 ; v1(56.9,15.635) 57.433,16.168 57.921,16.168 58.189,15.9 v1(58.4,15.9) 59.1,15.2 U17.17@59.1,15.129
  Bottom Layer w0.254: v1(22.3,16.8) 22.529,16.8 23.406,15.924 23.414,15.924 24.743,14.595 55.217,14.595 56.257,15.635 v1(56.9,15.635) ; R41.7@57.174,17.685 57.174,17.126 v1(58.4,15.9)
  other v2: 5.9,35.225
THM_DIS: R55.1 U2.25 | length 10.5
  Top Layer w0.254: v1(82.877,26.85) R55.1@83.9,26.85 ; v1(83.4,25.2) 83.467,25.133 84.121,25.133 84.254,25 86,25 87.214,26.214 89.163,26.214 89.382,26.433 90.333,26.433
  Bottom Layer w0.254: v1(82.877,26.85) 82.877,26.562 83.381,26.058 83.381,25.197 83.384,25.2 v1(83.4,25.2)
TM_C\S\: R54.1 U2.18 U15.1 | length 23.6
  Top Layer w0.254: v1(83.8,29.382) U15.1@85.467,29.382 85.467,30.483 R54.1@85.325,30.625 ; v1(83.9,24.6) 86.17,24.6 87.403,25.833 89.733,25.833 v1(89.8,25.9) ; v1(97.125,26.6) 97.425,26.9 U2.18@97.425,27.828
  Bottom Layer w0.254: v1@83.8,24.646 83.846,24.6 v1(83.9,24.6) ; v1(83.8,29.382) 83.933,29.249 v1@83.933,24.779 ; v1(89.8,25.9) 89.9,25.9 91.188,27.188 96.537,27.188 v1(97.125,26.6)
TXCAN: R13.2 U2.6 U3.5 | length 22.1
  Top Layer w0.254: U2.6@96.625,19.228 96.625,18.575 v1(97.25,17.95) ; v1(98.881,15.281) 103.018,15.281 v1(103.2,15.1) 105.431,15.1 R13.2@105.5,15.031
  Bottom Layer w0.254: U3.5@93,13.321 93.921,13.321 94.5,13.9 96.4,13.9 97.781,15.281 v1(98.881,15.281) ; v1(97.25,17.95) 97.48,17.72 100.519,17.72 101.939,16.3 103.139,15.1 v1(103.2,15.1)
TXLIN: P20.2 P20.4 U21.1
VCC: C1.2 C2.2 P5.1 P7.1 U1.20
VINT_MC1: C18_MC1.2 U8_MC1.15 U8_MC1.20 | length 7.5
  Top Layer w0.254: C18_MC1.2@91.875,45.368 92.657,46.15 U8_MC1.20@93.875,46.15 94.725,46.15 94.975,46.4 94.975,49.15 94.725,49.4 U8_MC1.15@93.875,49.4
VINT_MC2: C18_MC2.2 U8_MC2.15 U8_MC2.20 | length 7.5
  Top Layer w0.254: U8_MC2.15@33.1,44.032 32.25,44.032 32,44.282 32,47.032 32.25,47.282 U8_MC2.20@33.1,47.282 34.318,47.282 C18_MC2.2@35.1,48.064
VOUT_A: U5.4 U6.4 U19.1 | length 16.2
  Top Layer w0.254: U5.4@30.55,13.648 30.55,15.3 31,15.75 32.447,15.75 ; 33.5,16.803 32.693,15.996 32.447,15.75 ; U6.4@41.95,13.7 41.95,14.8 41,15.75 32.447,15.75
VOUT_B: U7.4 U19.2 | length 16.3
  Top Layer w0.254: U7.4@18.95,13.786 18.95,14.95 19.667,15.667 30.378,15.667 30.842,16.131 32.179,16.131 33.119,17.071 ; U19.2@34.551,19.335 U19.2@34.588,19.372
pads on no net: P2. P2.10 P3. P4. P5. P6. P7. P8. P11. P12. P13. P14. P15. P16. P16_MC1. P16_MC2. P17.21 P17.22 P18. P18.10 P19.3 P19.5 P20.1 P20.3 R4.6 R24.1 S3.1 S3.2 S3.4 U2.24 U3.12 U13.1 U13.3 U13.7 U13.8 U14.6 U14.7 U16.4 U17.29 U20.12 U20.31 U20.32 U21.3 U21.5 U21.12
copper on no net: | length 4.2
  Bottom Layer w0.254: 42.2,30.2 41.725,30.2 v1(41.125,29.6) 41.675,29.05 42.225,29.05 ; v1@103,7 103,7.25 v1@103,7.75 ; v1@113,7 113,7.25 v1@113,7.75
  other v1: 103.25,7 113.25,7 103.25,7.75 113.25,7.75
  other v2: 75.5,6 16.25,6.15 31.55,6.15 45.03,6.15 100.65,6.162 117.1,6.162 50.2,7.5 83.2,7.5 30.35,7.9 39.2,7.9 21.45,8 5.9,18.775 18.9,18.775 109.1,18.775 122.1,18.775 109.1,35.225 122.1,35.225 21,47.8 115.95,48.1
  other v3: 57.9,6.498 69.9,6.498 6,6.75 122,6.75 58,47.198 70,47.198 122,47.25 5.3,47.6

## Polygon pours and split planes (outlines as drawn)
GND on Top Layer "Amplifier_GND" (solid, pour order 24): 57.49,13.039 57.5,13.048 58.6,13.048 58.585,11.944 60.04,10.489 62.05,10.489 62.123,10.417 62.123,8.848 63.215,8.848 63.206,9.333 63.206,9.864 63.404,9.864 63.931,9.337 63.998,9.337 68.094,9.355 69.5,10.761 69.5,12.948 67.972,12.948 67.972,12.556 67.827,12.41 67.827,11.675 67.2,11.048 65.415,11.048 64.505,11.959 64.505,12.614 65.14,13.248 67.4,13.248 67.4,13.527 67.721,13.848 67.721,14.948 56.9,14.948 56.9,13.629
GND on Top Layer "Amplifier_GND" (solid, pour order 12): 90.1,31.4 91,30.5 100.21,30.5 100.21,18.21 98.6,16.6 90.602,16.6 89.9,17.302 90.1,17.502
GND on Top Layer "Amplifier_GND" (solid, pour order 18): 84.9,28.761 84.939,28.8 90.1,28.8 90.1,28 84.9,28
GND on Top Layer "Amplifier_GND" (solid, pour order 16): 73.4,29.1 77.2,29.1 78.1,30 78.1,31.9 79,31.9 79,28.5 78.6,28.1 73.4,28.1
GND on Top Layer "Amplifier_GND" (solid, pour order 14): 74.8,22.6 79.35,22.6 80.65,21.3 83.9,21.3 83.9,20.4 83.872,20.372 79.128,20.372 77.8,21.7 74.8,21.7
GND on Top Layer "Amplifier_GND" (solid, pour order 10): 23.6,53.2 22.475,52.075 22.475,42.575 23.6,41.45 30.189,41.45 31.439,40.2 36.301,40.2 37.526,41.425 37.526,49.7 36.301,50.925 36.301,50.95 31.475,50.95 29.225,53.2
NetU8_MC2_22 on Top Layer "Amplifier_GND" (solid, pour order 8): 32.35,50.032 33.85,50.032 33.85,48.282 32.35,48.282
GND on Top Layer "GND_L01_P000" (solid, pour order 0): 33.701,18.085 37.451,18.085 37.951,18.585 37.951,20.085 38.201,20.335 42.751,20.335 42.751,21.535 42.701,21.585 36.451,21.585 35.426,20.56 35.426,19.085 33.701,19.085
NetP11_2 on Top Layer "Amplifier_GND" (solid, pour order 6): 26.475,15.014 28.225,15.014 28.225,11.34 26.475,11.34
NetP15_2 on Top Layer "Amplifier_GND" (solid, pour order 4): 14.875,15.151 16.625,15.151 16.625,11.477 14.875,11.477
NetP13_2 on Top Layer "Amplifier_GND" (solid, pour order 2): 38,15.116 39.75,15.116 39.75,11.442 38,11.442
GND on Bottom Layer "Amplifier_GND" (solid, pour order 22): 16.7,22.162 17.1,22.562 17.1,25.662 16.7,26.062 15.5,26.062 15.5,23.862 16.3,23.862 16.3,22.562 15.3,22.562 15.3,22.162
GND on Bottom Layer "Amplifier_GND" (solid, pour order 20): 85.8,14.616 84.7,14.616 84.7,14.1 84.1,13.5 81.8,13.5 79.6,11.3 79.6,10.4 80.327,10.4 80.395,10.468 82.468,10.468 85.8,13.8

## Keep-outs
GND:
  rectangle: 97.7,21.4 98.9,22.4

## Silkscreen, mask and mechanical layers (free items; w line width, h text height)
Top Overlay:
  lines w0.2: 81.725,33.15 81.725,32.71 82.225,32.21 83.747,32.21 84.225,32.688 84.225,33.15
  text "PROG" at 81.5,38.785 h0.75
  text "PROG <-> RUN" at 88.75,38.65 h0.75
  text "UART" at 100.21,38.65 h0.75
  text "TX" at 104.397,36.5 h0.75
  text "RX" at 104.5,34 h0.75
  text "RST" at 102.25,30.625 h0.75
  text "TX" at 93.25,7.5 h0.75 r90
  text "RX" at 95,7.5 h0.75 r90
  text "RST" at 100.25,7 h0.75 r90
  text "TX_CAN" at 96.75,4.5 h0.75 r90
  text "RX_CAN" at 98.5,4.5 h0.75 r90
Mechanical 1:
  lines w0.254: 12.1,17.35 12.1,36.1 ; 12.5,17.75 0,17.75 0,36.5 12.5,36.5 ; 15.5,42 15.5,53.75 ; 16.3,42.2 16.55,42.45 44.05,42.45 44.3,42.7 ; 20.2,45.4 48.2,45.4 ; 43.5,42.5 43.5,54 ; 79.25,54 108.75,54 108.75,42 108.25,41.5 79.5,41.5 ; 79.35,41.95 79.35,53.95 ; 84.899,41.899 85.149,41.649 ; 87.9,10.8 111.15,10.8 ; 88,11 88,0 111.25,0 111.25,11 ; 95.1,18.6 107.6,18.6 ; 95.5,37.75 108,37.75 ; 99.3,19.3 99.3,38.05 ; 107.9,18.8 107.9,37.55 ; 115.4,18.55 115.4,37.3 ; 115.5,18.75 128,18.75 128,37.5 115.5,37.5
  text "MOTOR 1  / (BOTTOM COPPER)" at 81.2,56.5 h1.52
  text "HEATERS  / (TOP AND  / BOTTOM)" at 19.654,18.596 h1.52 r90
  text "SENSOR PCB / CONNECTOR FACES / RIGHT / (TOP COPPER)" at 93.3,9.5 h1.52
  text "MOTOR 2  / (BOTTOM COPPER)" at 97.3,4.7 h1.52
  text "INCOMING FROM SSM / (BOTTOM COPPER)" at 89.4,1.5 h1.52
  text "THERMISTORS / (TOP COPPER)" at 128.3,0 h1.52 r90
Mechanical 13:
  lines w0.2: -0.25,39 127.392,39 ; 0,15.7 127.642,15.7

## Text inside footprints (layer, text, board x,y; h text height)
P1: Top Overlay "6" at 86.999,36.452 h0.75; Top Overlay "5" at 86.999,33.912 h0.75; Top Overlay "2" at 77.855,36.452 h0.75; Top Overlay "1" at 78.363,33.912 h0.75
P17: Top Overlay "2" at 57.142,22.552 h0.75 r180; Top Overlay "1" at 57.142,26.718 h0.75 r180; Top Overlay "20" at 72.128,22.552 h0.75 r180; Top Overlay "19" at 72.128,26.718 h0.75 r180; Mechanical 13 "2" at 57.142,22.552 h1.27 r180; Mechanical 13 "1" at 57.142,26.718 h1.27 r180; Mechanical 13 "20" at 72.128,22.552 h1.27 r180; Mechanical 13 "19" at 72.128,26.718 h1.27 r180
P19: Top Overlay "6" at -12.917,84.614 h0.75 r90; Top Overlay "5" at -10.377,84.614 h0.75 r90; Top Overlay "2" at -12.917,75.47 h0.75 r90; Top Overlay "1" at -10.377,75.978 h0.75 r90
P20: Top Overlay "1" at 28.758,33.503 h0.75 r90; Top Overlay "2" at 26.218,32.995 h0.75 r90; Top Overlay "4" at 26.218,39.599 h0.75 r90; Top Overlay "3" at 28.758,39.599 h0.75 r90